# EAGLE board tortoise_control (EAGLE 4.16)

Size 100 x 80 mm. Coordinates in mm from the lower left corner, seen from the top.
Outline: 0,0 100,0 100,80 0,80 0,0
Copper layers (1*16): Top 0.035mm / dielectric 1.5mm / Bottom 0.035mm
Design rules "default": minimum track width 10mil, minimum drill 24mil, track to track 8mil, track to pad 8mil, pad to pad 8mil, via to via 8mil, smd to smd 8mil, copper to edge 40mil, drill to drill 8mil, minimum pad ring 10mil, minimum via ring 8mil, stop-mask expansion 4mil, vias tented up to drill 0mil, thermal gap 10mil

## Footprints (pad centres in the part's own frame; a part is rotated, then mirrored left to right if it is on the bottom)
LED5MM = drill 0.813 pad 1.676 octagon: A -1.27,0; K 1.27,0
JP1 = drill 0.914 long: 1 0,-1.27; 2 0,1.27
320-938 = drill 2.007 octagon: 1 -2.388,4.013; 2 -2.388,0; 3 -2.388,-4.013; 4 2.388,4.013; 5 2.388,0; 6 2.388,-4.013

## Placement (x,y rotation side)
D1  [LED5MM]  76.67,47.62 0 top
D2  [LED5MM]  76.67,40 180 top
JP1  [JP1]  52.54,48.89 180 top
JP2  [JP1]  63.97,37.46 90 top
JP3  [JP1]  75.4,55.24 0 top
JP4  [JP1]  63.97,60.32 270 top
JP5  [JP1]  52.54,40 180 top
S2  [320-938]  62.7,50.16 0 top

## Library data of the parts
D1 D2 = led_2
JP1-JP5 = jumper
S2 = switch

## Nets
+12V: JP1.2 JP2.2 JP3.2 JP4.2 S2.3 S2.6
GND: JP1.1 JP2.1 JP3.1 JP4.1 S2.1 S2.4
N$1: D1.A D2.K JP5.2
N$2: D1.K D2.A S2.5
N$5: JP5.1 S2.2

## Tracks (layer width: path | path; a pad name or v marks a point on that pad's centre or on a via)
+12V  (5 unrouted)
GND  (5 unrouted)
N$1  (2 unrouted)
N$2  (2 unrouted)
N$5  (1 unrouted)